# Altium PCB URC_ezFET_Lite.PcbDoc
Units mil, origin at the board's own origin, x right, y up, seen from the top; angles counter-clockwise.
Board outline 1870 x 1500 mil, 2 copper layers (Top Layer, Bottom Layer); 36 components, 29 nets, 175 pads, 52 vias.
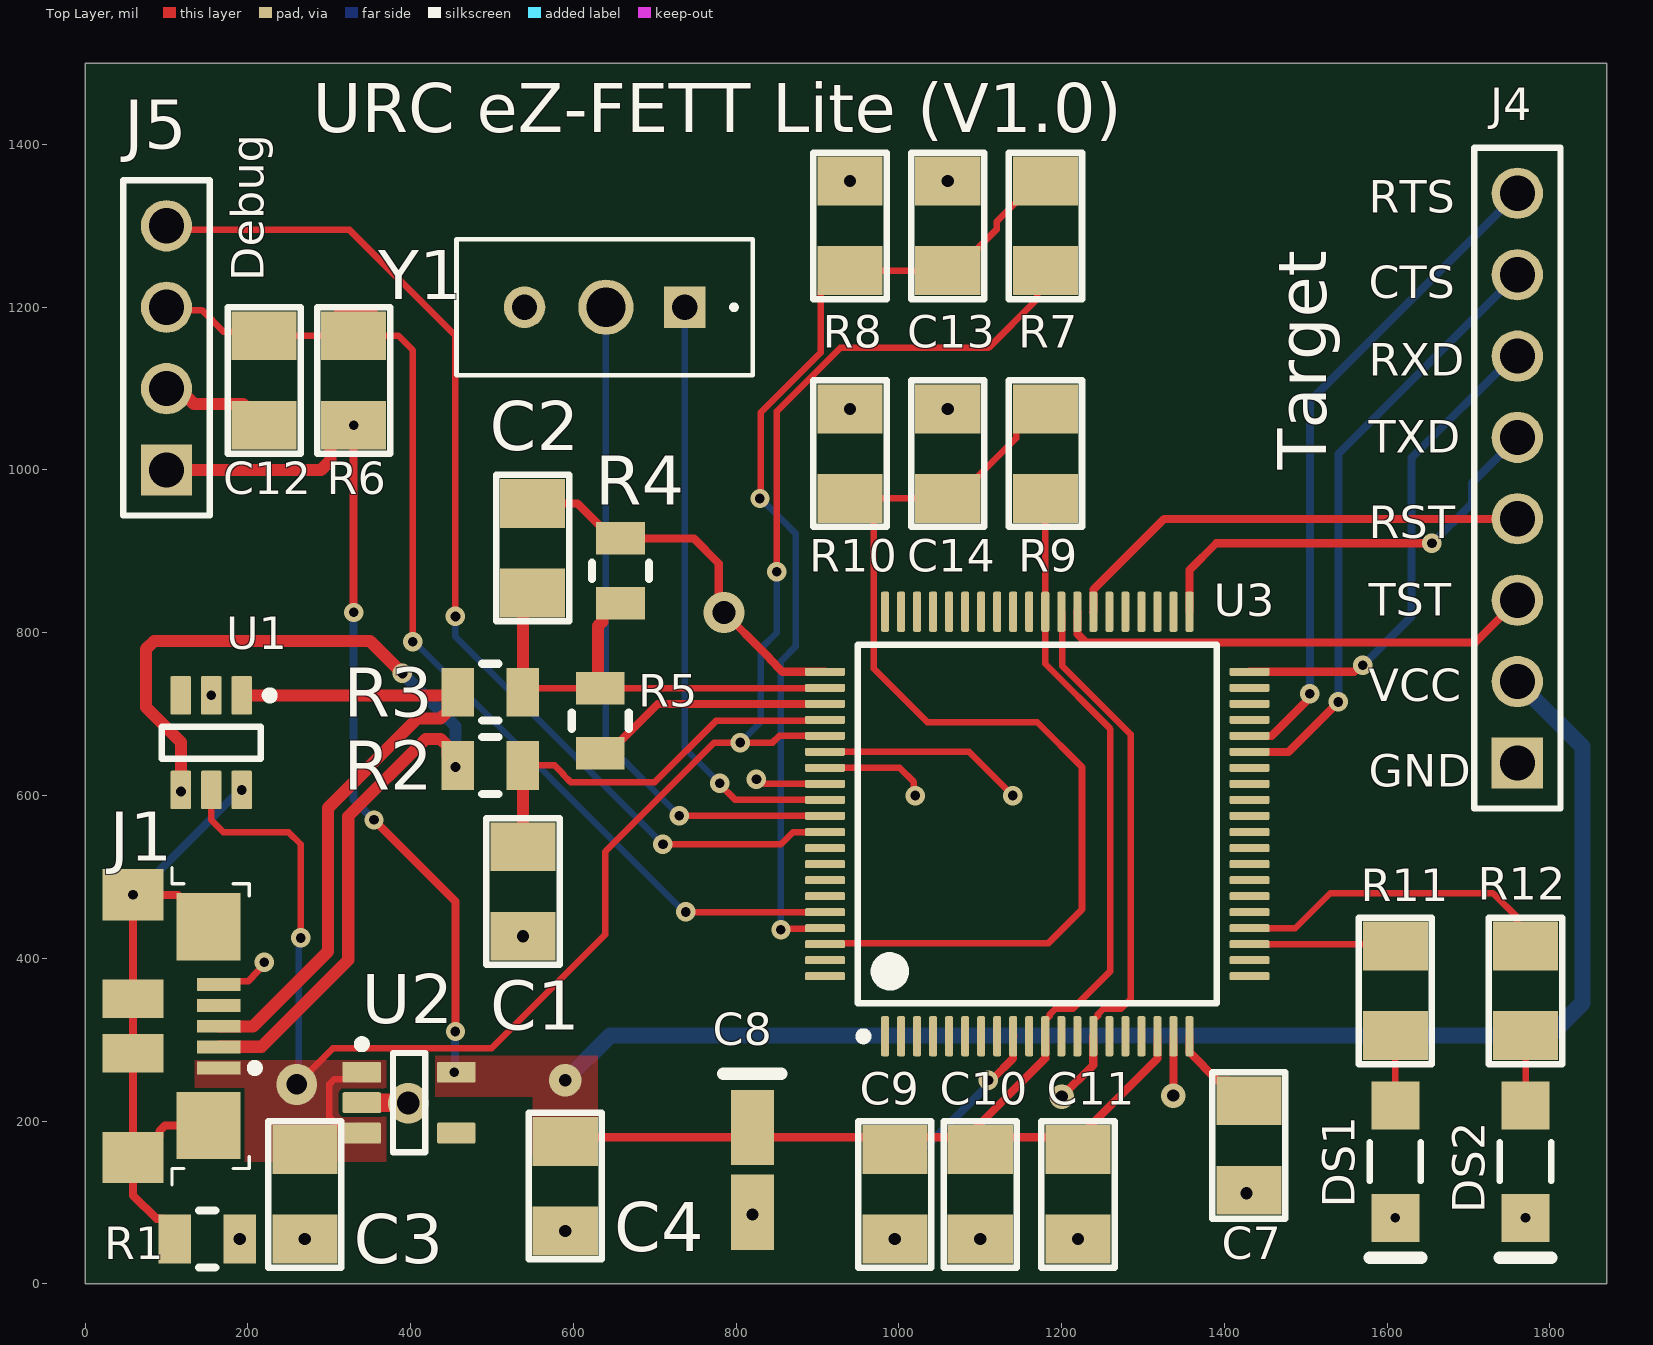
[diagram p0: Top Layer view]
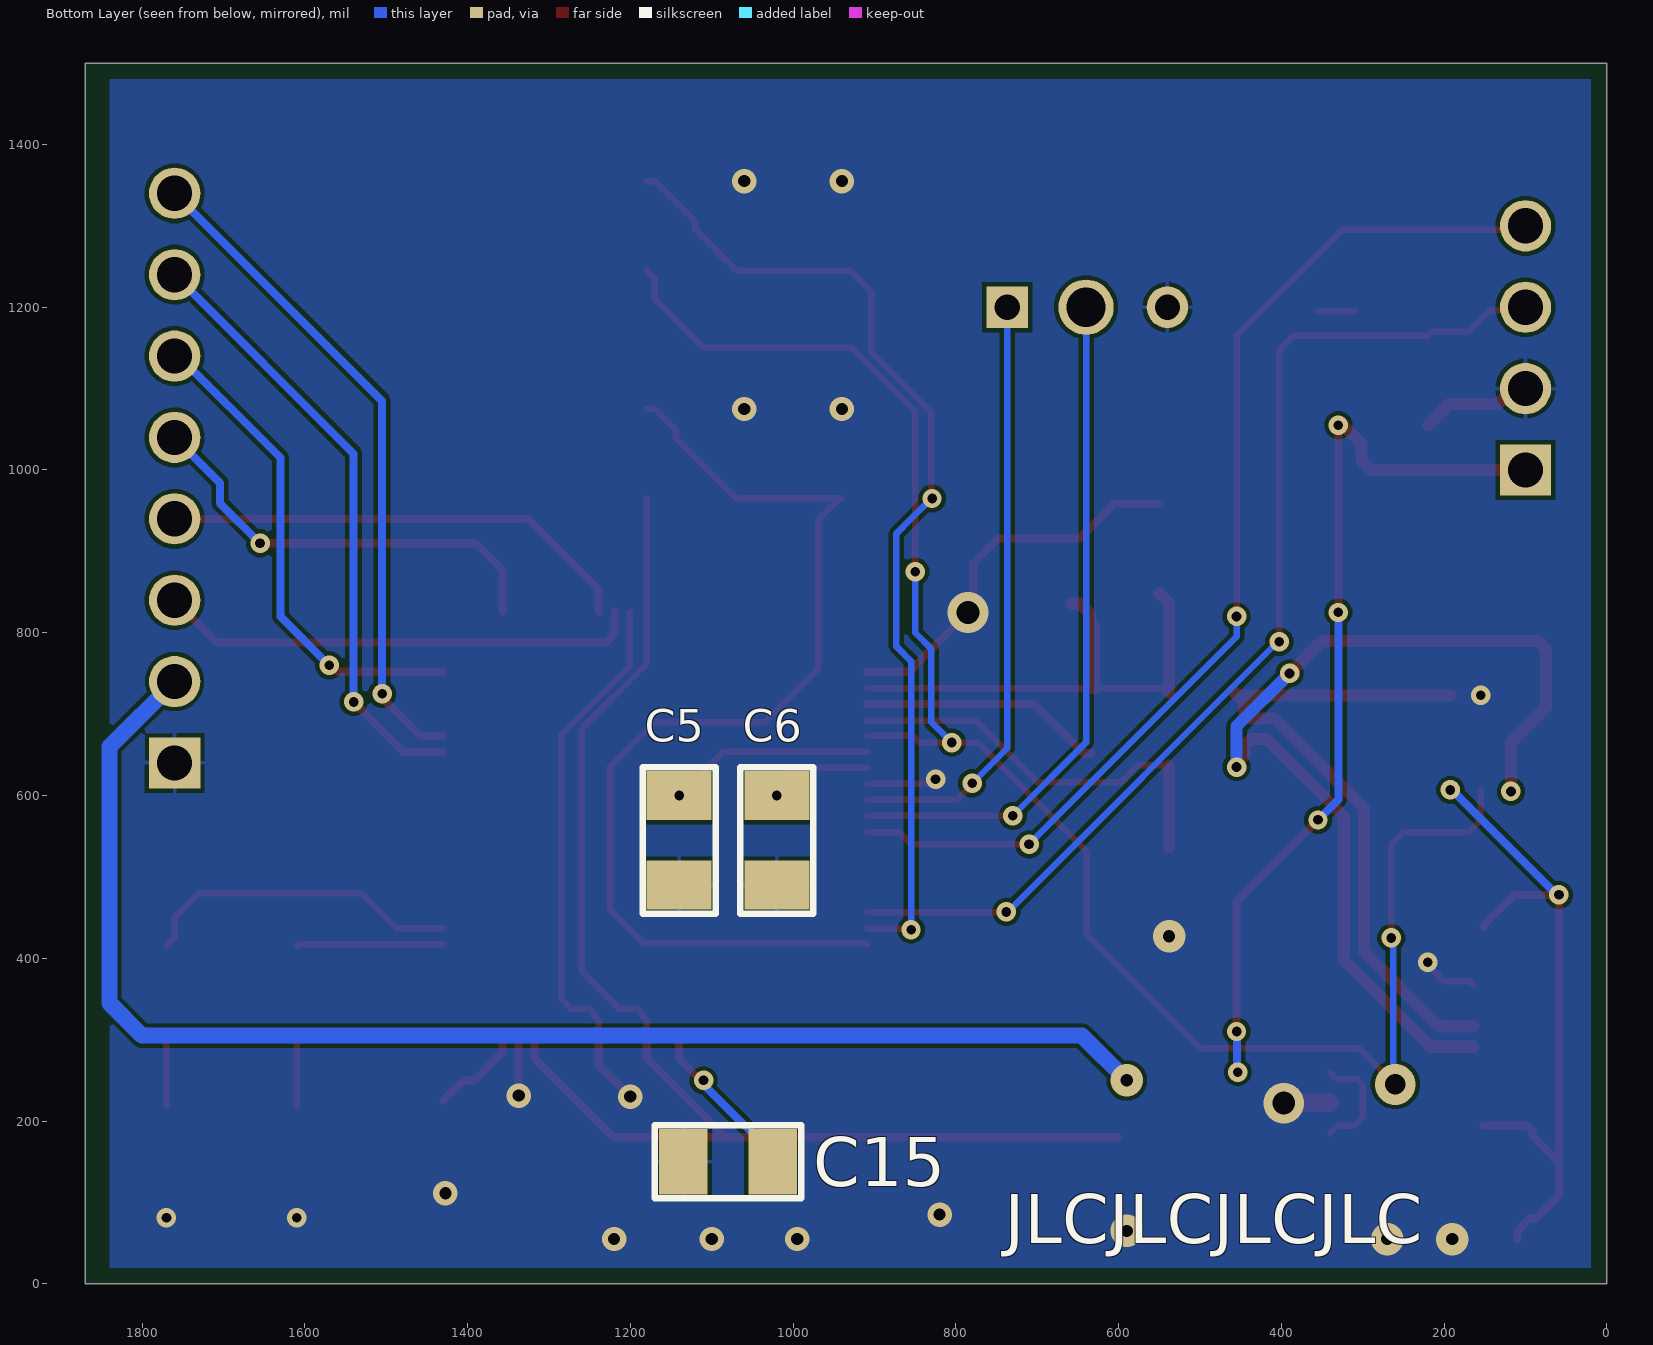
[diagram p1: Bottom Layer view, seen from below]
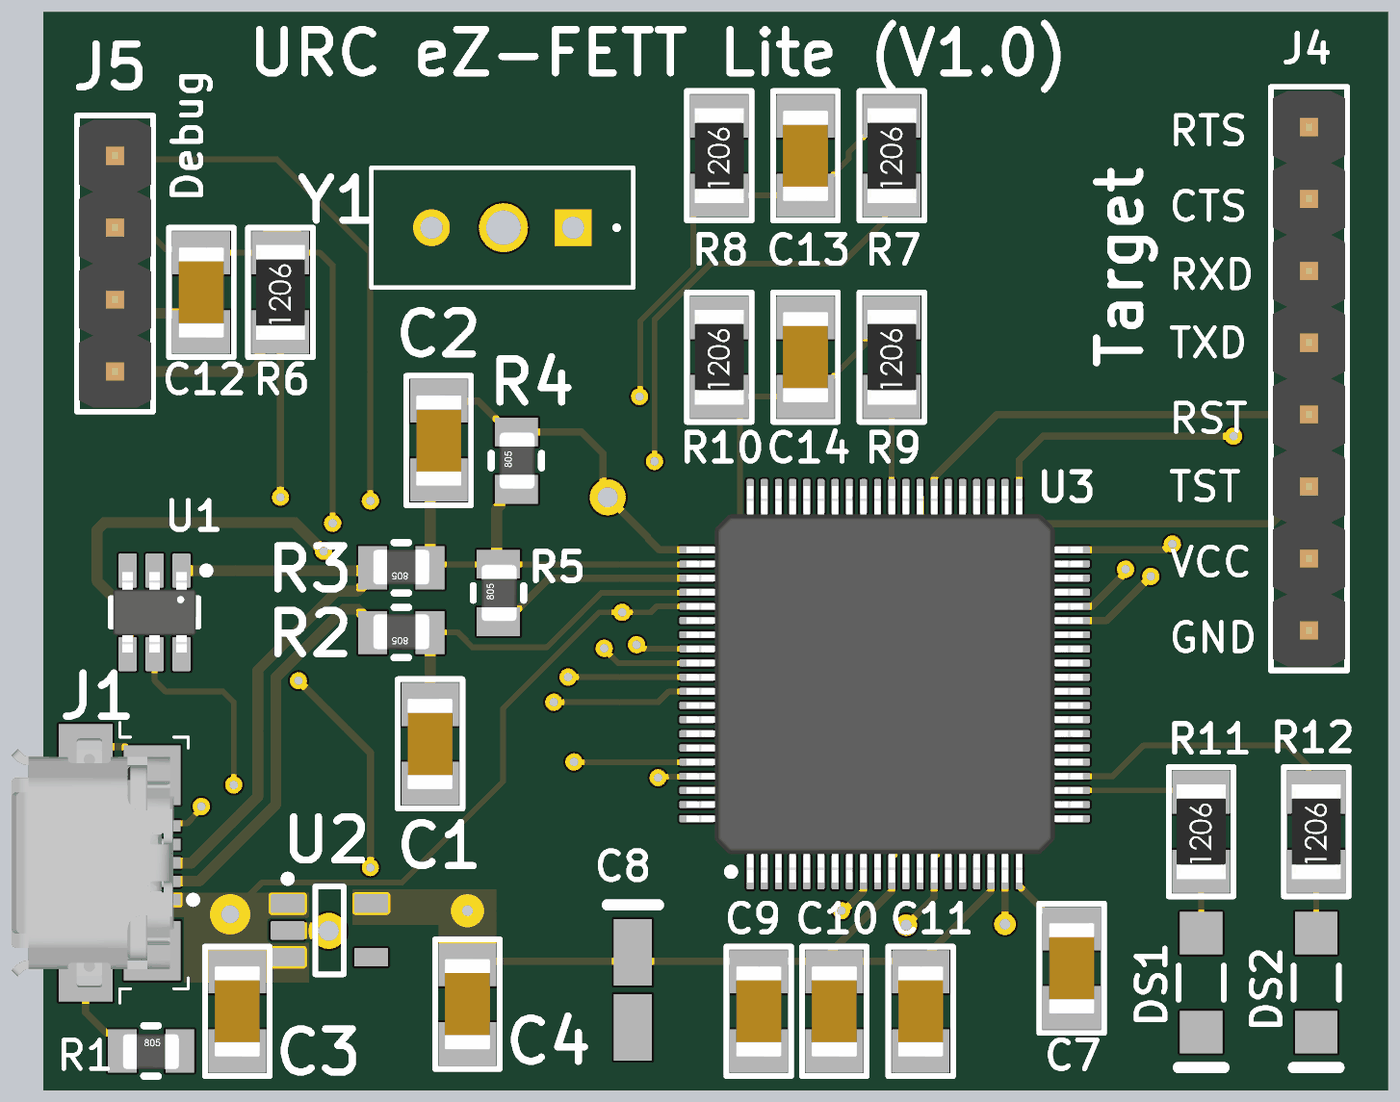
[diagram p2: 3D render of the assembled board from above, using the file's embedded part models]
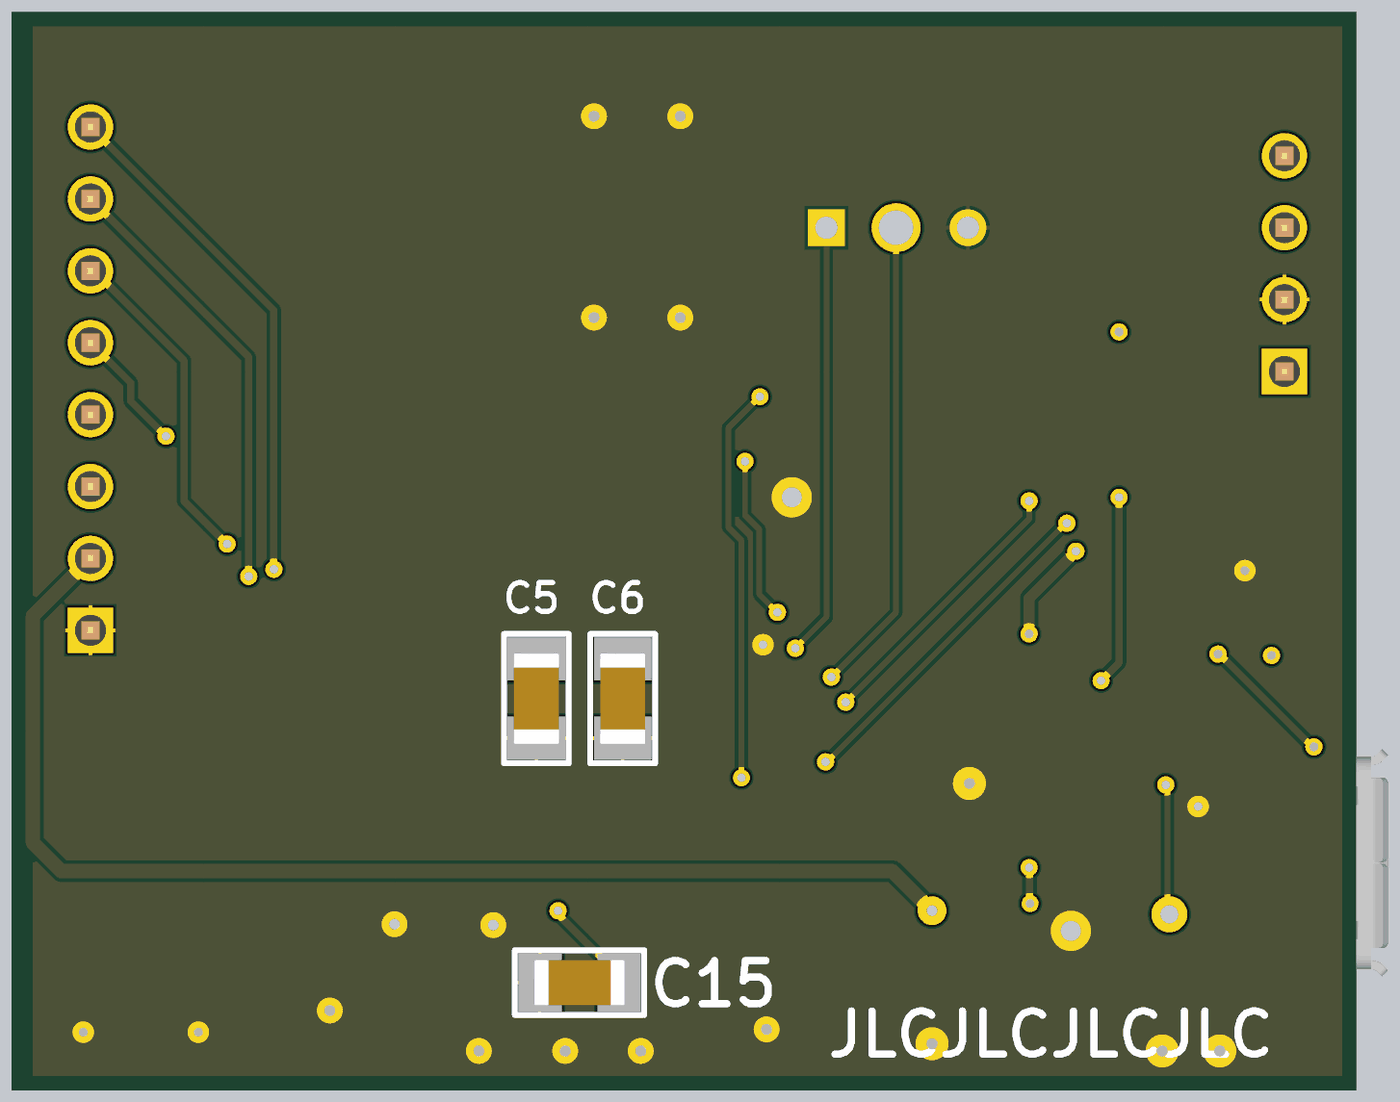
[diagram p3: 3D render of the assembled board from below, using the file's embedded part models]

## Layer stack, top to bottom
Top Solder: solder mask 0.4, Solder Resist, Dk 3.5
Top Layer: signal copper 1.4
Dielectric 1: dielectric 12.6, FR-4, Dk 4.8
Bottom Layer: signal copper 1.4
Bottom Solder: solder mask 0.4, Solder Resist, Dk 3.5

## Board outline
0,0 0,1500 1870,1500 1870,0

## Design rules (kind name [scope] priority, off if disabled: settings)
BoardOutlineClearance [All] p1: gap=7.87 ignorepadtopadclearanceinfootprint=FALSE
Clearance [All] p1: gap=5 ignorepadtopadclearanceinfootprint=FALSE except(9.84: Arc-Hole Track-Hole SMDPad-Hole THPad-Hole Via-Hole Fill-Hole Poly-Hole Region-Hole Text-Hole)
ComponentClearance [All] p1: gap=5 collisioncheckmode=3 verticalgap=5 showdistances=TRUE
DiffPairsRouting [All] p1: maxlimit=10 minlimit=5 mostfreqgap=5 toplayer_minwidth=5 toplayer_maxwidth=1000 toplayer_prefwidth=5 bottomlayer_minwidth=5 bottomlayer_maxwidth=1000 bottomlayer_prefwidth=5 substack1={C3BCEE91-9C6A-4448-B973-E072E894BD0B} toplayer_{c3bcee91-9c6a-4448-b973-e072e894bd0b}_minwidth=15 toplayer_{c3bcee91-9c6a-4448-b973-e072e894bd0b}_maxwidth=15 toplayer_{c3bcee91-9c6a-4448-b973-e072e894bd0b}_prefwidth=15 bottomlayer_{c3bcee91-9c6a-4448-b973-e072e894bd0b}_minwidth=15 bottomlayer_{c3bcee91-9c6a-4448-b973-e072e894bd0b}_maxwidth=15 bottomlayer_{c3bcee91-9c6a-4448-b973-e072e894bd0b}_prefwidth=15 maxuncoupledlength=500
Height [All] p1: minheight=0 maxheight=71497.94 prefheight=500
HoleSize [All] p1: absolutevalues=TRUE maxlimit=248.03 minlimit=11.81 maxpercent=80.000 minpercent=20.000
HoleToHoleClearance [All] p1: gap=9.84 allowstackedmicrovias=FALSE
MinimumAnnularRing [All] p1: minimumring=3
MinimumSolderMaskSliver [All] p1: minsoldermaskwidth=0
PlaneClearance [All] p1: clearance=5
PlaneConnect PlaneConnectPowerPads [InPadClass('PowerPads')] p1: planeconnectstyle=Direct reliefexpansion=20 reliefentries=4 reliefconductorwidth=10 reliefairgap=10
PlaneConnect [All] p2: pad.planeconnectstyle=Relief pad.reliefexpansion=11.81 pad.reliefentries=4 pad.reliefconductorwidth=5 pad.reliefairgap=5 via.planeconnectstyle=Direct via.reliefexpansion=11.81 via.reliefentries=4 via.reliefconductorwidth=5 via.reliefairgap=5
PolygonConnect PolygonConnectPowerPads [All vs (InPadClass('PowerPads'))] p1: connectstyle=Direct reliefconductorwidth=10 reliefentries=4 polygonreliefangle="90 Angle" airgapwidth=10
PolygonConnect [All] p2: thpad.connectstyle=Relief thpad.reliefconductorwidth=5 thpad.reliefentries=4 thpad.polygonreliefangle="90 Angle" thpad.airgapwidth=5 smdpad.connectstyle=Relief smdpad.reliefconductorwidth=5 smdpad.reliefentries=4 smdpad.polygonreliefangle="90 Angle" smdpad.airgapwidth=5 via.connectstyle=Direct via.reliefconductorwidth=5 via.reliefentries=4 via.polygonreliefangle="90 Angle" via.airgapwidth=5
RoutingVias [All] p1: holewidth=11.81 width=23.62 viastyle="Through Hole" minholewidth=11.81 minwidth=23.62 maxholewidth=23.62 maxwidth=259.84
SilkToSilkClearance [All] p1: silktosilkclearance=0
SilkToSolderMaskClearance [IsPad] p1: minsilkscreentomaskgap=0 clearancetoexposedcopper=TRUE
SolderMaskExpansion [All] p1: expansion=2.95 istentingtop=FALSE
Width [All] p1: maxlimit=1000 minlimit=5 preferedwidth=5 substack1={C3BCEE91-9C6A-4448-B973-E072E894BD0B} minimp=50.000000 maximp=50.000000 favimp=50.000000
20 further rules are at their usual default settings.

## Classes and differential pairs
component class URC_eZFET_Lite-Headers: J4 J5
component class URC_ezFET_Lite: C5 C6 C7 C8 C9 C10 C11 C12 C13 C14 C15 DS1 DS2 R5 R6 R7 R8 R9 R10 R11 R12 U3 Y1
component class URC_ezFET_Lite-USB: C1 C2 C3 C4 J1 R1 R2 R3 R4 U1 U2
differential pair USB_RES: +USB_RES_P -USB_RES_N
differential pair USB_D: +USB_D_P -USB_D_N

## Components (designator, comment, footprint, x,y, rotation, side; value= is the part's Value field where it differs from the comment)
C1 "10pF" SMD-1206C 538,482 r0 top
C2 "10pF" SMD-1206C 550,904 r180 top
C3 "0.10µF" SMD-1206C 270,110 r0 top
C4 "0.10µF" SMD-1206C 590,120 r0 top
C5 "0.22µF" SMD-1206C 1140,545 r180 bottom
C6 "0.22µF" SMD-1206C 1020,545 r180 bottom
C7 "0.47µF" SMD-1206C 1430,170 r0 top
C8 "T491A106K010AT" KEMT-A-3216-18-2_M 820,140 r270 top
C9 "0.10µF" SMD-1206C 995,110 r0 top
C10 "0.10µF" SMD-1206C 1100,110 r0 top
C11 "0.10µF" SMD-1206C 1220,110 r0 top
C12 "1000pF" SMD-1206C 220,1110 r0 top
C13 "33pF" SMD-1206C 1060,1300 r180 top
C14 "33pF" SMD-1206C 1060,1020 r180 top
C15 "0.10µF" SMD-1206C 1080,150 r270 bottom
DS1 "HSMH-C150" AVAG-HSMX-C150_V 1610,150 r270 top
DS2 "HSMG-C150" AVAG-HSMX-C150_V 1770,150 r270 top
J1 "ZX62R-B-5P" HIRO-ZX62R-B-5P_V 111.66,316.54 r270 top
J4 "61300811121" 61300811121 1760,990 r90 top
J5 "61300411121" 61300411121 100,1150 r90 top
R1 "33" SMD-0805-RES 150,55 r270 top
R2 "27" SMD-0805-RES 498,637 r90 top
R3 "27" SMD-0805-RES 498,727 r90 top
R4 "1M" SMD-0805-RES 658,876 r0 top
R5 "1.4k" SMD-0805-RES 633,692 r0 top
R6 "47k" SMD-1206-RES 330,1110 r0 top
R7 "240k" SMD-1206-RES 1180,1300 r0 top
R8 "150k" SMD-1206-RES 940,1300 r0 top
R9 "220k" SMD-1206-RES 1180,1020 r0 top
R10 "220k" SMD-1206-RES 940,1020 r0 top
R11 "470" SMD-1206-RES 1610,360 r0 top
R12 "390" SMD-1206-RES 1770,360 r0 top
U1 "TPD4E001DBVR" DBV0006A_M 155,665 r270 top
U2 "TLV70033DDCR" DDC0005A_M 398.07,222.6 r0 top
U3 "MSP430F5529IPN" PN0080A_L 1170,565 r90 top
Y1 "CSTLS4M00G56-A0" CSTLS_G 540,1200 r180 top value=Value

## Footprints (in the part's own frame and the unit in brackets; to place one, negate y for a bottom-side part, rotate by r counter-clockwise, add the part's x,y. Pads: shape width x height; smd on the part's side, far side on the other; paste and mask are expansions set on the pad)
61300411121 [mm] "Pin Header, pitch 2.54 mm, THT, Vertical, single row, 4p"
  rect 1.6x1.6 hole 1.1: 1(-3.81,0)
  round 1.6 hole 1.1: 2(-1.27,0) 3(1.27,0) 4(3.81,0)
  silkscreen extent -5.23,-1.35 5.23,1.35, body extent -5.08,-1.27 5.08,1.27, height 8.57
61300811121 [mm] "Pin Header, pitch 2.54 mm, THT, Vertical, single row, 8p"
  rect 1.6x1.6 hole 1.1: 1(-8.89,0)
  round 1.6 hole 1.1: 2(-6.35,0) 3(-3.81,0) 4(-1.27,0) 5(1.27,0) 6(3.81,0) 7(6.35,0) 8(8.89,0)
  silkscreen extent -10.31,-1.35 10.31,1.35, body extent -10.16,-1.27 10.16,1.27, height 8.57
AVAG-HSMX-C150_V [mm] "SMD, 2-Leads, Body 3.2x1.6mm"
  rect 1.5x1.5 smd: 1(-1.75,0) 2(1.75,0)
  silkscreen extent -0.6,-0.8 3,0.8, body extent -1.6,-0.8 1.6,0.8, height 1.1
CSTLS_G [mil]
  rect 51x51 hole 31 mask+0: 1(-196.85,0)
  round 51 hole 31 mask+0: 2(0,0)
  round 68 hole 48: 3(-100,0)
  silkscreen extent -280,-84 84,84, body extent 0,0 10,10, height 10
DBV0006A_M [mm] "SOT23, 6-Leads, Body 3.05x1.75mm, Pitch 0.95mm, IPC Low Density"
  rrect15% 1.2x0.65 smd: 1(-1.475,0.95) 2(-1.475,0) 3(-1.475,-0.95) 4(1.475,-0.95) 5(1.475,0) 6(1.475,0.95)
  silkscreen extent -1.6,-1.55 0.5,1.95, body extent -1.42,-1.46 1.42,1.46, height 1.11
DDC0005A_M [mm] "SOT23, 5-Leads, Body 3.05x1.75mm, Pitch 0.95mm, IPC Low Density"
  rrect15% 1.2x0.65 smd: 1(-1.475,0.95) 2(-1.475,0) 3(-1.475,-0.95) 4(1.475,-0.95) 5(1.475,0.95)
  silkscreen extent -1.6,-1.55 0.5,1.95, body extent -0.88,-1.52 0.87,1.53, height 1.1
HIRO-ZX62R-B-5P_V [mm] "USB Micro-B R/A Connector"
  rect 0.4x1.35 smd: 1(1.3,1.338) 2(0.65,1.338) 3(0,1.338) 4(-0.65,1.338) 5(-1.3,1.338)
  rect 2.1x2 smd: 6(-3.1,1.012) 11(3.1,1.012)
  rect 1.6x1.9 smd: 7(-4.1,-1.338) 10(4.1,-1.338)
  rect 1.2x1.9 smd: 8(-0.85,-1.338) 9(0.85,-1.338)
  silkscreen extent -4.95,-0.13 4.95,2.58, body extent -4.4,-3.95 4.4,1.78, height 2.71
KEMT-A-3216-18-2_M [mm] "Molded TAN Capacitor, 2-Leads, Body 3.4x1.8mm, IPC Low Density"
  rect 2.35x1.35 smd: 1(-1.325,0) 2(1.325,0)
  silkscreen extent -3,-0.9 -3,0.9, body extent -1.7,-0.9 1.7,0.9, height 1.8
PN0080A_L [mm] "QFP, 80-Leads, Body 12x12mm, Pitch 0.5mm, IPC High Density"
  rrect40% 1.25x0.25 smd: 1(-6.625,4.75) 2(-6.625,4.25) 3(-6.625,3.75) 4(-6.625,3.25) 5(-6.625,2.75) 6(-6.625,2.25) 7(-6.625,1.75) 8(-6.625,1.25) 9(-6.625,0.75) 10(-6.625,0.25) 11(-6.625,-0.25) 12(-6.625,-0.75) 13(-6.625,-1.25) 14(-6.625,-1.75) 15(-6.625,-2.25) 16(-6.625,-2.75) 17(-6.625,-3.25) 18(-6.625,-3.75) 19(-6.625,-4.25) 20(-6.625,-4.75) 41(6.625,-4.75) 42(6.625,-4.25) 43(6.625,-3.75) 44(6.625,-3.25) 45(6.625,-2.75) 46(6.625,-2.25) 47(6.625,-1.75) 48(6.625,-1.25) 49(6.625,-0.75) 50(6.625,-0.25) 51(6.625,0.25) 52(6.625,0.75) 53(6.625,1.25) 54(6.625,1.75) 55(6.625,2.25) 56(6.625,2.75) 57(6.625,3.25) 58(6.625,3.75) 59(6.625,4.25) 60(6.625,4.75)
  rrect40% 0.25x1.25 smd: 21(-4.75,-6.625) 22(-4.25,-6.625) 23(-3.75,-6.625) 24(-3.25,-6.625) 25(-2.75,-6.625) 26(-2.25,-6.625) 27(-1.75,-6.625) 28(-1.25,-6.625) 29(-0.75,-6.625) 30(-0.25,-6.625) 31(0.25,-6.625) 32(0.75,-6.625) 33(1.25,-6.625) 34(1.75,-6.625) 35(2.25,-6.625) 36(2.75,-6.625) 37(3.25,-6.625) 38(3.75,-6.625) 39(4.25,-6.625) 40(4.75,-6.625) 61(4.75,6.625) 62(4.25,6.625) 63(3.75,6.625) 64(3.25,6.625) 65(2.75,6.625) 66(2.25,6.625) 67(1.75,6.625) 68(1.25,6.625) 69(0.75,6.625) 70(0.25,6.625) 71(-0.25,6.625) 72(-0.75,6.625) 73(-1.25,6.625) 74(-1.75,6.625) 75(-2.25,6.625) 76(-2.75,6.625) 77(-3.25,6.625) 78(-3.75,6.625) 79(-4.25,6.625) 80(-4.75,6.625)
  silkscreen extent -6.75,-5.6 5.6,5.6, body extent -7,-7 7,7, height 1.56
SMD-0805-RES [mil]
  rect 60x40 smd: 1(0,40) 2(0,-40)
  silkscreen extent -35,-10 35,10, body extent -24,-39 26,39, height 31
SMD-1206-RES [mil]
  rect 80x60 smd: 1(0,55) 2(0,-55)
  silkscreen extent -45,-90 45,90, body extent -34,-66 34,66, height 33
SMD-1206C [mil]
  rect 80x60 smd: 1(0,55) 2(0,-55)
  silkscreen extent -45,-90 45,90, body extent -31,-63 32,63, height 39

## Part data
C1 C2: library part GCM31A7U2J100JX01D, "CAP CER 10PF 630V U2J 1206", Digi-Key Part Number=490-5037-1-ND, Manufacturer="Murata Electronics North America", Operating Temperature="-55°C ~ 125°C", Package / Case="1206 (3216 Metric)", Ratings=AEC-Q200, Temperature Coefficient=U2J, Tolerance=±5%, Voltage=630V, @ qty=0, Applications=Automotive, Datasheets=http://www.murata.com/~/media/webrenewal/support/library/catalog/products/capacitor/mlcc/c03e.ashx, Factory Stock=0, Features=-, Height - Seated (Max)=-, Image=//media.digikey.com/Renders/Murata%20Renders/GR331BD72E473KW01L.jpg, Lead Spacing=-, Lead Style=-, Minimum Quantity=1, Mounting Type="Surface Mount, MLCC", Packaging="Cut Tape (CT)", Part Number=GCM31A7U2J100JX01D, Part Status=Active, Quantity Available=4301, Series=GCM, Size / Dimension="0.126\" L x 0.063\" W (3.20mm x 1.60mm)", Thickness (Max)="0.039\" (1.00mm)", Unit Price (USD)=0.52
C3 C4 C9 C10 C11: library part GCM319R71H104KA37D, "CAP CER 0.1UF 50V X7R 1206", Digi-Key Part Number=490-11166-1-ND, Manufacturer="Murata Electronics North America", Operating Temperature="-55°C ~ 125°C", Package / Case="1206 (3216 Metric)", Ratings=AEC-Q200, Temperature Coefficient=X7R, Tolerance=±10%, Voltage=50V, @ qty=0, Applications=Automotive, Datasheets=http://www.murata.com/~/media/webrenewal/support/library/catalog/products/capacitor/mlcc/c03e.ashx, Factory Stock=0, Features=-, Height - Seated (Max)=-, Image=//media.digikey.com/Renders/Murata%20Renders/GR331BD72E473KW01L.jpg, Lead Spacing=-, Lead Style=-, Minimum Quantity=1, Mounting Type="Surface Mount, MLCC", Packaging="Cut Tape (CT)", Part Number=GCM319R71H104KA37D, Part Status=Active, Quantity Available=5066, Series=GCM, Size / Dimension="0.126\" L x 0.063\" W (3.20mm x 1.60mm)", Thickness (Max)="0.037\" (0.95mm)", Unit Price (USD)=0.21
C5 C6: library part GCM31MR71H224KA37L, "CAP CER 0.22UF 50V X7R 1206", Digi-Key Part Number=490-8059-1-ND, Manufacturer="Murata Electronics North America", Operating Temperature="-55°C ~ 125°C", Package / Case="1206 (3216 Metric)", Ratings=AEC-Q200, Temperature Coefficient=X7R, Tolerance=±10%, Voltage=50V, @ qty=0, Applications=Automotive, Datasheets=http://www.murata.com/~/media/webrenewal/support/library/catalog/products/capacitor/mlcc/c03e.ashx, Factory Stock=0, Features=-, Height - Seated (Max)=-, Image=//media.digikey.com/Renders/Murata%20Renders/GR331BD72E473KW01L.jpg, Lead Spacing=-, Lead Style=-, Minimum Quantity=1, Mounting Type="Surface Mount, MLCC", Packaging="Cut Tape (CT)", Part Number=GCM31MR71H224KA37L, Part Status=Active, Quantity Available=6941, Series=GCM, Size / Dimension="0.126\" L x 0.063\" W (3.20mm x 1.60mm)", Thickness (Max)="0.049\" (1.25mm)", Unit Price (USD)=0.34
C7: library part GCM31MR71H474KA37L, "CAP CER 0.47UF 50V X7R 1206", Digi-Key Part Number=490-8061-1-ND, Manufacturer="Murata Electronics North America", Operating Temperature="-55°C ~ 125°C", Package / Case="1206 (3216 Metric)", Ratings=AEC-Q200, Temperature Coefficient=X7R, Tolerance=±10%, Voltage=50V, @ qty=0, Applications=Automotive, Datasheets=http://www.murata.com/~/media/webrenewal/support/library/catalog/products/capacitor/mlcc/c03e.ashx, Factory Stock=0, Features=-, Height - Seated (Max)=-, Image=//media.digikey.com/Renders/Murata%20Renders/GR331BD72E473KW01L.jpg, Lead Spacing=-, Lead Style=-, Minimum Quantity=1, Mounting Type="Surface Mount, MLCC", Packaging="Cut Tape (CT)", Part Number=GCM31MR71H474KA37L, Part Status=Active, Quantity Available=11849, Series=GCM, Size / Dimension="0.126\" L x 0.063\" W (3.20mm x 1.60mm)", Thickness (Max)="0.049\" (1.25mm)", Unit Price (USD)=0.53
C8: library part CMP-2000-05172-1, "Capacitor, Tantalum, 10 uF, +/- 10%, 10 V, -55 to 125 degC, 2-Pin SMD (1206), RoHS, Tape and Reel", Capacitance=10µF, ESR (Equivalent Series Resistance)=3.8Ohm, Lifetime @ Temp.=2000Hrs@85degC, Manufacturer=Kemet, Manufacturer Size Code=A, Operating Temperature=-55degC~125degC, Package / Case=1206(3216Metric), Package Description="2-Pin Surface Mount Device, Body 3.2 x 1.6 mm", Package Reference=1206, Standard Package=2,000, Tolerance=±10%, Voltage - Rated=10V, Catalog Drawings=T49x,T5xxSeries_A-side1T49x,T5xxSeries_A,B-side2T49x,T5xxSeries_A,SBottom, Category=Capacitors, Datasheet URL=http://www.farnell.com/datasheets/1824869.pdf, Datasheet Version=Apr-14, Family=TantalumCapacitors, Features=GeneralPurpose, Height - Seated (Max)="0.071\"(1.80mm)", Lead Spacing=-, Manufacturer URL=http://www.kemet.com/, Mounting Type=SurfaceMount, Online Catalog=T491Series, Other Names=399-3684-2, Packaging=Tape&Reel(TR), Product Training Modules=CapacitorBasics-TypicalUsesforCapacitorsDeratingGuidelinesforSurfaceMountTantalumCapacitors, Series=T491, Size / Dimension="0.126\"Lx0.063\"W(3.20mmx1.60mm)", Type=Molded
C12: library part GRM319R71H102KA01D, "CAP CER 1000PF 50V X7R 1206", Digi-Key Part Number=490-11610-1-ND, Manufacturer="Murata Electronics North America", Operating Temperature="-55°C ~ 125°C", Package / Case="1206 (3216 Metric)", Ratings=-, Temperature Coefficient=X7R, Tolerance=±10%, Voltage=50V, @ qty=0, Applications="General Purpose", Datasheets=http://www.murata.com/~/media/webrenewal/support/library/catalog/products/capacitor/mlcc/c02e.pdf, Factory Stock=0, Features=-, Height - Seated (Max)=-, Image=//media.digikey.com/Renders/Murata%20Renders/GR331BD72E473KW01L.jpg, Lead Spacing=-, Lead Style=-, Minimum Quantity=1, Mounting Type="Surface Mount, MLCC", Packaging="Cut Tape (CT)", Part Number=GRM319R71H102KA01D, Part Status=Active, Quantity Available=4837, Series=GRM, Size / Dimension="0.126\" L x 0.063\" W (3.20mm x 1.60mm)", Thickness (Max)="0.037\" (0.95mm)", Unit Price (USD)=0.19
C13 C14: library part GCM31A7U2J330JX01D, "CAP CER 33PF 630V U2J 1206", Digi-Key Part Number=490-5040-1-ND, Manufacturer="Murata Electronics North America", Operating Temperature="-55°C ~ 125°C", Package / Case="1206 (3216 Metric)", Ratings=AEC-Q200, Temperature Coefficient=U2J, Tolerance=±5%, Voltage=630V, @ qty=0, Applications=Automotive, Datasheets=http://www.murata.com/~/media/webrenewal/support/library/catalog/products/capacitor/mlcc/c03e.ashx, Factory Stock=0, Features=-, Height - Seated (Max)=-, Image=//media.digikey.com/Renders/Murata%20Renders/GR331BD72E473KW01L.jpg, Lead Spacing=-, Lead Style=-, Minimum Quantity=1, Mounting Type="Surface Mount, MLCC", Packaging="Cut Tape (CT)", Part Number=GCM31A7U2J330JX01D, Part Status=Active, Quantity Available=10466, Series=GCM, Size / Dimension="0.126\" L x 0.063\" W (3.20mm x 1.60mm)", Thickness (Max)="0.039\" (1.00mm)", Unit Price (USD)=0.52
C15: library part GCJ31CR72E104KXJ3L, "CAP CER 0.1UF 250V X7R 1206", Digi-Key Part Number=490-12647-1-ND, Manufacturer="Murata Electronics North America", Operating Temperature="-55°C ~ 125°C", Package / Case="1206 (3216 Metric)", Ratings=AEC-Q200, Temperature Coefficient=X7R, Tolerance=±10%, Voltage=250V, @ qty=0, Applications="Automotive, Boardflex Sensitive", Datasheets=http://www.murata.com/~/media/webrenewal/support/library/catalog/products/capacitor/mlcc/c03e.ashx, Factory Stock=0, Features="Soft Termination", Height - Seated (Max)=-, Image=//media.digikey.com/Renders/Murata%20Renders/GR331BD72E473KW01L.jpg, Lead Spacing=-, Lead Style=-, Minimum Quantity=1, Mounting Type="Surface Mount, MLCC", Packaging="Cut Tape (CT)", Part Number=GCJ31CR72E104KXJ3L, Part Status=Active, Quantity Available=3645, Series=GCJ, Size / Dimension="0.126\" L x 0.063\" W (3.20mm x 1.60mm)", Thickness (Max)="0.071\" (1.80mm)", Unit Price (USD)=0.36
DS1: library part CMP-2000-06426-1, "LED Uni-Color Red, 65 mW, 25 mA, -40 to 85 degC, 2-Pin SMD, RoHS, Tape and Reel", Emitting Color=Red, Forward Current=25mA, Forward Voltage=2.6V, Manufacturer=Avago, Operating Temp Range=-40Cto85C, Operating Temperature Classification=Industrial, Package Description="2-Pin Surface Mount Device, Body 3.2 x 1.6 mm", Package Reference=HSMX-C150, Package Type=ChipLed, Power Dissipation=78W, Reverse Voltage=5V, Test Current (It)=20mA, Chip Material=GaAlAs, Datasheet URL=http://media.digikey.com/pdf/Data%20Sheets/Avago%20PDFs/HSMz-Czzz.pdf, Datasheet Version=03/2012, DELETED=Compliant, Dominant Wave Length=639nm, High Brightness=No, Lens Dimensions=2x1.6x0.6mm, Lens Type=ColorlessDiffused, Lum Intensity=17mcd, Luminous Intensity=17mcd, Main Category=ChipLED, Manufacturer URL=http://www.avagotech.com/, Mounting=SurfaceMount, Mounting Technology=SurfaceMount, Number of  Elements=1, Packaging=TapeandReel, Peak Wavelength=660nm, Pin Count=2, Product Depth (mm)=1.6mm, Product Height (mm)=1.1mm, Product Length (mm)=3.2mm, Rad Hardened=No, Shape Type=Rectangular, Type=Uni-Color, Viewing Angle=170deg
DS2: library part CMP-2000-05061-1, "Chip LED, Green, 65 mW, 25 mA, -40 to 85 degC, 2-Pin SMD, RoHS, Tape and Reel", Forward Current If=20mA, Forward Voltage=2.2V, Forward Voltage VF Max=2.6V, LED Colour=Green, Manufacturer=Avago, Operating Temperature Max=85degC, Operating Temperature Min=-30degC, Operating Temperature Range=-30degCto+85degC, Opto Case Style=SMD, Package Description="2-Pin Surface Mount Device, Body 3.2 x 1.6 mm", Package Reference=HSMX-C150, Reverse Protection Voltage=5V, Storage Temperature Min=-40degC, Bulb Size=1.6mmx2mm, Datasheet URL=https://datasheet.ciiva.com/11774/0900766b804a6539-11774272.pdf, Datasheet Version=Mar-12, Dominant Wavelength=572nm, External Depth=1.1mm, External Length / Height=3.2mm, External Width=1.6mm, Forward Current If Max=20mA, LED Mounting=SMD, LED Type=Standard, Lens Shape=Rectangular, Light Output Orientation=TopEmitting, Luminous Intensity=15mcd, Luminous Intensity @ If Min=4.5mcd, Luminous Intensity Typ=15mcd, Manufacturer URL=http://www.avagotech.com/, Material=GaP, Mounting Type=SMD, MSL=MSL2A-4weeks, No. of Pins=2, Opto Mounting Orientation=Top, Packaging=CutTape, Peak Wavelength=570nm, PIV Max=5V, Storage Temperature Max=85degC, SVHC=NoSVHC(16-Jun-2014), Viewing Angle=170deg, Voltage Vf Min=2.2V, Voltage Vf Typ=2.2V, Wavelength Typ=572nm
J1: library part CMP-0031-00001-1, "Connector; USBMicro-B,Reverse type, SMT; 5 Position; Right Angle", Operating Temperature="-30 to 85 degC", ComponentLink1Description="Manufacturer URL", ComponentLink1URL=http://www.hirose.com/â€Ž, ComponentLink2Description=Datasheet, ComponentLink2URL=http://www.hirose.co.jp/cataloge_hp/e24200011.pdf, DatasheetVersion=08/2010, Mounting Technology="Surface Mount", PackageDescription="5-Pin USB Micro-B R/A Connector", PackageReference=ZX62R-B-5P, PartNumber=ZX62R-B-5P
J4: library part CMP-1502-01076-1, "THT Vertical Pin Header WR-PHD, Pitch 2.54 mm, Single Row, 8 pins", Contact Resistance=20mOhm, Manufacturer="Wurth Elektronik", Operating Temperature=-40to105degC, Rated Current=3A, Withstanding Voltage=500VAC, Working Voltage=250VAC, Datasheet URL=https://katalog.we-online.de/em/datasheet/6130xx11121.pdf, Gender=Male, Manufacturer URL=http://www.we-online.de, Mounting Technology=THT, Orientation=Vertical, Package Reference=61300811121, Packaging=Bag, Part Number=61300811121, Pin Number=8, Pitch=2.54mm, Publisher=WurthElektronik, Row Number=Single
J5: library part CMP-1502-01064-1, "THT Vertical Pin Header WR-PHD, Pitch 2.54 mm, Single Row, 4 pins", Contact Resistance=20mOhm, Manufacturer="Wurth Elektronik", Operating Temperature=-40to105degC, Rated Current=3A, Withstanding Voltage=500VAC, Working Voltage=250VAC, Datasheet URL=https://katalog.we-online.de/em/datasheet/6130xx11121.pdf, Gender=Male, Manufacturer URL=http://www.we-online.de, Mounting Technology=THT, Orientation=Vertical, Package Reference=61300411121, Packaging=Bag, Part Number=61300411121, Pin Number=4, Pitch=2.54mm, Publisher=WurthElektronik, Row Number=Single
R1: library part ERJ-6ENF33R0V, "RES SMD 33 OHM 1% 1/8W 0805", Digi-Key Part Number=P33.0CCT-ND, Manufacturer="Panasonic Electronic Components", Operating Temperature="-55°C ~ 155°C", Package / Case="0805 (2012 Metric)", Power (Watts)="0.125W, 1/8W", Supplier Device Package=0805, Temperature Coefficient=±100ppm/°C, Tolerance=±1%, @ qty=1500, Composition="Thick Film", Datasheets=http://industrial.panasonic.com/www-cgi/jvcr13pz.cgi?E+PZ+3+AOA0002+ERJ6ENF33R0V+7+WW, Factory Stock=0, Failure Rate=-, Features="Automotive AEC-Q200", Height - Seated (Max)="0.028\" (0.70mm)", Image=//media.digikey.com/Renders/Panasonic%20Renders/ERJ-0805%20Pkg.jpg, Minimum Quantity=1, Number of Terminations=2, Packaging="Cut Tape (CT)", Part Number=ERJ-6ENF33R0V, Part Status=Active, Quantity Available=96423, Series=ERJ, Size / Dimension="0.079\" L x 0.049\" W (2.00mm x 1.25mm)", Unit Price (USD)=0.00729
R2 R3: library part ERJ-P06J270V, "RES SMD 27 OHM 5% 1/2W 0805", Digi-Key Part Number=P27ADCT-ND, Manufacturer="Panasonic Electronic Components", Operating Temperature="-55°C ~ 155°C", Package / Case="0805 (2012 Metric)", Power (Watts)="0.5W, 1/2W", Supplier Device Package=0805, Temperature Coefficient=±300ppm/°C, Tolerance=±5%, @ qty=1500, Composition="Thick Film", Datasheets=https://industrial.panasonic.com/cdbs/www-data/pdf/RDA0000/AOA0000C243.pdf, Factory Stock=0, Failure Rate=-, Features="Automotive AEC-Q200, Pulse Withstanding", Height - Seated (Max)="0.028\" (0.70mm)", Image=//media.digikey.com/Renders/Panasonic%20Renders/ERJ-0805%20Pkg.jpg, Minimum Quantity=1, Number of Terminations=2, Packaging="Cut Tape (CT)", Part Number=ERJ-P06J270V, Part Status=Active, Quantity Available=18271, Series=ERJ, Size / Dimension="0.079\" L x 0.049\" W (2.00mm x 1.25mm)", Unit Price (USD)=0.01839
R4: library part ERJ-P06J105V, "RES SMD 1M OHM 5% 1/2W 0805", Digi-Key Part Number=P1.0MADCT-ND, Manufacturer="Panasonic Electronic Components", Operating Temperature="-55°C ~ 155°C", Package / Case="0805 (2012 Metric)", Power (Watts)="0.5W, 1/2W", Supplier Device Package=0805, Temperature Coefficient=±200ppm/°C, Tolerance=±5%, @ qty=1500, Composition="Thick Film", Datasheets=https://industrial.panasonic.com/cdbs/www-data/pdf/RDA0000/AOA0000C243.pdf, Factory Stock=0, Failure Rate=-, Features="Automotive AEC-Q200, Pulse Withstanding", Height - Seated (Max)="0.028\" (0.70mm)", Image=//media.digikey.com/Renders/Panasonic%20Renders/ERJ-0805%20Pkg.jpg, Minimum Quantity=1, Number of Terminations=2, Packaging="Cut Tape (CT)", Part Number=ERJ-P06J105V, Part Status=Active, Quantity Available=36684, Series=ERJ, Size / Dimension="0.079\" L x 0.049\" W (2.00mm x 1.25mm)", Unit Price (USD)=0.01839
R5: library part ERJ-6ENF1401V, "RES SMD 1.4K OHM 1% 1/8W 0805", Digi-Key Part Number=P1.40KCCT-ND, Manufacturer="Panasonic Electronic Components", Operating Temperature="-55°C ~ 155°C", Package / Case="0805 (2012 Metric)", Power (Watts)="0.125W, 1/8W", Supplier Device Package=0805, Temperature Coefficient=±100ppm/°C, Tolerance=±1%, @ qty=1500, Composition="Thick Film", Datasheets=http://industrial.panasonic.com/www-cgi/jvcr13pz.cgi?E+PZ+3+AOA0002+ERJ6ENF1401V+7+WW, Factory Stock=0, Failure Rate=-, Features="Automotive AEC-Q200", Height - Seated (Max)="0.028\" (0.70mm)", Image=//media.digikey.com/Renders/Panasonic%20Renders/ERJ-0805%20Pkg.jpg, Minimum Quantity=1, Number of Terminations=2, Packaging="Cut Tape (CT)", Part Number=ERJ-6ENF1401V, Part Status=Active, Quantity Available=52856, Series=ERJ, Size / Dimension="0.079\" L x 0.049\" W (2.00mm x 1.25mm)", Unit Price (USD)=0.00729
R6: library part ERJ-P08J473V, "RES SMD 47K OHM 5% 2/3W 1206", Digi-Key Part Number=P47KALCT-ND, Manufacturer="Panasonic Electronic Components", Operating Temperature="-55°C ~ 155°C", Package / Case="1206 (3216 Metric)", Power (Watts)="0.667W, 2/3W", Supplier Device Package=1206, Temperature Coefficient=±200ppm/°C, Tolerance=±5%, @ qty=1500, Composition="Thick Film", Datasheets=https://industrial.panasonic.com/cdbs/www-data/pdf/RDA0000/AOA0000C243.pdf, Factory Stock=0, Failure Rate=-, Features="Automotive AEC-Q200, Pulse Withstanding", Height - Seated (Max)="0.028\" (0.70mm)", Image=//media.digikey.com/Renders/Panasonic%20Renders/ERJ-1206%20Pkg.jpg, Minimum Quantity=1, Number of Terminations=2, Packaging="Cut Tape (CT)", Part Number=ERJ-P08J473V, Part Status=Active, Quantity Available=29484, Series=ERJ, Size / Dimension="0.126\" L x 0.063\" W (3.20mm x 1.60mm)", Unit Price (USD)=0.02178
R7: library part ERJ-P08J244V, "RES SMD 240K OHM 5% 2/3W 1206", Digi-Key Part Number=P240KALCT-ND, Manufacturer="Panasonic Electronic Components", Operating Temperature="-55°C ~ 155°C", Package / Case="1206 (3216 Metric)", Power (Watts)="0.667W, 2/3W", Supplier Device Package=1206, Temperature Coefficient=±200ppm/°C, Tolerance=±5%, @ qty=1500, Composition="Thick Film", Datasheets=https://industrial.panasonic.com/cdbs/www-data/pdf/RDA0000/AOA0000C243.pdf, Factory Stock=0, Failure Rate=-, Features="Automotive AEC-Q200, Pulse Withstanding", Height - Seated (Max)="0.028\" (0.70mm)", Image=//media.digikey.com/Renders/Panasonic%20Renders/ERJ-1206%20Pkg.jpg, Minimum Quantity=1, Number of Terminations=2, Packaging="Cut Tape (CT)", Part Number=ERJ-P08J244V, Part Status=Active, Quantity Available=21188, Series=ERJ, Size / Dimension="0.126\" L x 0.063\" W (3.20mm x 1.60mm)", Unit Price (USD)=0.02178
R8: library part ERJ-P08J154V, "RES SMD 150K OHM 5% 2/3W 1206", Digi-Key Part Number=P150KALCT-ND, Manufacturer="Panasonic Electronic Components", Operating Temperature="-55°C ~ 155°C", Package / Case="1206 (3216 Metric)", Power (Watts)="0.667W, 2/3W", Supplier Device Package=1206, Temperature Coefficient=±200ppm/°C, Tolerance=±5%, @ qty=1500, Composition="Thick Film", Datasheets=https://industrial.panasonic.com/cdbs/www-data/pdf/RDA0000/AOA0000C243.pdf, Factory Stock=0, Failure Rate=-, Features="Automotive AEC-Q200, Pulse Withstanding", Height - Seated (Max)="0.028\" (0.70mm)", Image=//media.digikey.com/Renders/Panasonic%20Renders/ERJ-1206%20Pkg.jpg, Minimum Quantity=1, Number of Terminations=2, Packaging="Cut Tape (CT)", Part Number=ERJ-P08J154V, Part Status=Active, Quantity Available=30000, Series=ERJ, Size / Dimension="0.126\" L x 0.063\" W (3.20mm x 1.60mm)", Unit Price (USD)=0.02178
R9 R10: library part ERJ-P08J224V, "RES SMD 220K OHM 5% 2/3W 1206", Digi-Key Part Number=P220KALCT-ND, Manufacturer="Panasonic Electronic Components", Operating Temperature="-55°C ~ 155°C", Package / Case="1206 (3216 Metric)", Power (Watts)="0.667W, 2/3W", Supplier Device Package=1206, Temperature Coefficient=±200ppm/°C, Tolerance=±5%, @ qty=1500, Composition="Thick Film", Datasheets=https://industrial.panasonic.com/cdbs/www-data/pdf/RDA0000/AOA0000C243.pdf, Factory Stock=0, Failure Rate=-, Features="Automotive AEC-Q200, Pulse Withstanding", Height - Seated (Max)="0.028\" (0.70mm)", Image=//media.digikey.com/Renders/Panasonic%20Renders/ERJ-1206%20Pkg.jpg, Minimum Quantity=1, Number of Terminations=2, Packaging="Cut Tape (CT)", Part Number=ERJ-P08J224V, Part Status=Active, Quantity Available=11189, Series=ERJ, Size / Dimension="0.126\" L x 0.063\" W (3.20mm x 1.60mm)", Unit Price (USD)=0.02178
R11: library part ERJ-8ENF4700V, "RES SMD 470 OHM 1% 1/4W 1206", Digi-Key Part Number=P470FCT-ND, Manufacturer="Panasonic Electronic Components", Operating Temperature="-55°C ~ 155°C", Package / Case="1206 (3216 Metric)", Power (Watts)="0.25W, 1/4W", Supplier Device Package=1206, Temperature Coefficient=±100ppm/°C, Tolerance=±1%, @ qty=1500, Composition="Thick Film", Datasheets=http://industrial.panasonic.com/www-cgi/jvcr13pz.cgi?E+PZ+3+AOA0002+ERJ8ENF4700V+7+WW, Factory Stock=0, Failure Rate=-, Features="Automotive AEC-Q200", Height - Seated (Max)="0.028\" (0.70mm)", Image=//media.digikey.com/Renders/Panasonic%20Renders/ERJ-1206%20Pkg.jpg, Minimum Quantity=1, Number of Terminations=2, Packaging="Cut Tape (CT)", Part Number=ERJ-8ENF4700V, Part Status=Active, Quantity Available=55045, Series=ERJ, Size / Dimension="0.126\" L x 0.063\" W (3.20mm x 1.60mm)", Unit Price (USD)=0.00933
R12: library part ERJ-8ENF3900V, "RES SMD 390 OHM 1% 1/4W 1206", Digi-Key Part Number=P390FCT-ND, Manufacturer="Panasonic Electronic Components", Operating Temperature="-55°C ~ 155°C", Package / Case="1206 (3216 Metric)", Power (Watts)="0.25W, 1/4W", Supplier Device Package=1206, Temperature Coefficient=±100ppm/°C, Tolerance=±1%, @ qty=1500, Composition="Thick Film", Datasheets=http://industrial.panasonic.com/www-cgi/jvcr13pz.cgi?E+PZ+3+AOA0002+ERJ8ENF3900V+7+WW, Factory Stock=0, Failure Rate=-, Features="Automotive AEC-Q200", Height - Seated (Max)="0.028\" (0.70mm)", Image=//media.digikey.com/Renders/Panasonic%20Renders/ERJ-1206%20Pkg.jpg, Minimum Quantity=1, Number of Terminations=2, Packaging="Cut Tape (CT)", Part Number=ERJ-8ENF3900V, Part Status=Active, Quantity Available=65574, Series=ERJ, Size / Dimension="0.126\" L x 0.063\" W (3.20mm x 1.60mm)", Unit Price (USD)=0.00933
U1: library part CMP-0326-00058-3, "Low-Capacitance + / - 15-kV ESD Protection Array for High-Speed Data Interfaces, 4 Channels, -40 to +85 degC, 6-pin SOT-23 (DBV), Green (RoHS & no Sb/Br)", Breakdown Voltage(Min)(V)=11, IO Capacitance(Typ)(pF)=1.5, Manufacturer="Texas Instruments", 1394 / Firewire=TRUE, ComponentLink1Description="Manufacturer URL", ComponentLink1URL=http://www.ti.com/, ComponentLink2Description=Datasheet, ComponentLink2URL=http://www.ti.com/general/docs/lit/getliterature.tsp?genericPartNumber=TPD4E001&fileType=pdf, ComponentLink3Description="URL Link1", ComponentLink3URL=SamplesURL:http://www.ti.com/product/tpd4e001#samples, DatasheetVersion=SLLS682G, Eco-Plan="Green (RoHS & no Sb/Br)", IEC 61000-4-2 Air-Gap(+/- kV)=15, IEC 61000-4-2 Contact(+/- kV)=8, IO Leakage Current(nA)=1.5, Mounting Technology="Surface Mount", PackageDescription="6-Pin Plastic Small-Outline Package, 2.9 x 1.6 mm Body, 0.95 mm Pitch, 2.8 mm Lead Span", PackageReference=DBV0006A, PackageVersion="revK, Mar-2006", PartNumber=TPD4E001DBVR, Serial ATA / eSATA=TRUE, SubFamily="ESD Solution", USB High Speed=TRUE
U2: library part CMP-0394-01056-2, "Single Output LDO, 200 mA, Fixed 3.3 V Output, 2 to 5.5 V Input, with Low IQ, 5-pin SOT (DDC), -40 to 125 degC, Green (RoHS & no Sb/Br)", Manufacturer="Texas Instruments", Accuracy(%)=2, Code_JEDEC=MO-193, ComponentLink1Description="Manufacturer URL", ComponentLink1URL=http://www.ti.com/, ComponentLink2Description=Datasheet, ComponentLink2URL=http://www.ti.com/general/docs/lit/getliterature.tsp?genericPartNumber=TLV70033&fileType=pdf, ComponentLink3Description="Package Specification", ComponentLink3URL=http://www.ti.com/litv/pdf/mpds123d, DatasheetVersion=SLVSA00D, Eco-Plan="Green (RoHS & no Sb/Br)", Fixed Output Options(V)=3.3, Iout(Max)(A)=0.2, Iq(Typ)(mA)=0.03, Mounting Technology="Surface Mount", PackageDescription="5-Pin Plastic Small Outline, Body 2.9 x 1.6 mm, 0.95 mm Pitch", PackageReference=DDC0005A, PackageVersion=4204403-2/E, PartNumber=TLV70033DDCR, SubFamily="Single Channel LDO", Vdo(Typ)(mV)=175, Vin(Max)(V)=5.5, Vin(Min)(V)=2, Vout Adj(Max)(V)=3.3, Vout Adj(Min)(V)=3.3
U3: library part CMP-0365-00412-2, "25 MHz Mixed Signal Microcontroller with 128 KB Flash, 8192 B SRAM and 63 GPIOs, -40 to 85 degC, 80-pin QFP (PN), Green (RoHS & no Sb/Br)", Frequency(MHz)=25, Manufacturer="Texas Instruments", Temp Sensor=Yes, ADC="12-bit SAR", ADC Channels=16, Brown Out Reset=Yes, Code_JEDEC=MS-018, Comparators=Yes, ComponentLink1Description="Manufacturer URL", ComponentLink1URL=http://www.ti.com/, ComponentLink2Description=Datasheet, ComponentLink2URL=http://www.ti.com/general/docs/lit/getliterature.tsp?genericPartNumber=MSP430F5529&fileType=pdf, ComponentLink3Description="Package Specification", ComponentLink3URL=http://www.ti.com/lit/ml/mtqf010a/mtqf010a.pdf, DatasheetVersion=SLAS590I, DMA=3, Eco-Plan="Green (RoHS & no Sb/Br)", Flash(KB)=128, GPIO=63, Mounting Technology="Surface Mount", Multiplier=32x32, PackageDescription="80-Pin Plastic Quad Flat Pack, Body 12 x 12 mm, Pitch 0.5 mm", PackageReference=PN0080A, PartNumber=MSP430F5529IPN, Real-Time Clock=Yes, SRAM(B)=8192, SubFamily="5 Series", SVS=Yes, Timers - 16-bit=4, USB=1, USCI_A (UART/LIN/IrDA/SPI)=2, USCI_B (I2C & SPI)=2, Watchdog=Yes
Y1: "No Description Available", Built_By=EMA_UL_Team, Copyright="Copyright (C) 2018 Accelerated Designs. All rights reserved", Manufacturer_Part_Number=CSTLS4M00G56-A0, RefDes=RefDes, Type=DEV, Vendor=Murata

## Via types
v1: diameter 24, hole 12, Top Layer to Bottom Layer, 27 vias
v2: diameter 30, hole 15, Top Layer to Bottom Layer, 11 vias
v3: diameter 23.62, hole 11.81, Top Layer to Bottom Layer, 6 vias
v4: diameter 40, hole 15, Top Layer to Bottom Layer, 5 vias
v5: diameter 50, hole 28, Top Layer to Bottom Layer, 2 vias
v6: diameter 50, hole 25, Top Layer to Bottom Layer, 1 vias

## Nets (pads, with @x,y where several pads share a name; then routed paths per layer and width w, separated by ;. In a path a pad name is that pad's centre, name@x,y a point inside that pad or via, vN(x,y) a via of type N, cw(c..) or ccw(c..) an arc to the next point about the centre after c; other vN are vias at no path point)
GND: C1.2 C2.2 C3.2 C4.2 C5.2 C6.2 C7.2 C8.2 C9.2 C10.2 C11.2 C12.2 C13.2 C14.2 C15.2 DS1.2 DS2.2 J1.5 J4.1 J5.2 R1.1 R4.1 R8.1 R10.1 U1.2 U2.2 U3.14 U3.19 U3.49 U3.61 U3.68 Y1.2 | length 1580.8
  Top Layer w8: J1.5 168.19,371.59 200.31,371.59 206.39,377.67 206.39,378.14 220,391.75 v1(220,395) ; U2.2 U2.2@340.3,222.3 ; v5@396.7,222.3 v5(397,222) ; v1(825,620) 829.33,620 835.12,614.21 U3.68 ; U3.49 1200.45,824.91 1200.45,759.55 1285,675 1285,350.28 1272.5,337.78 1251.09,337.78 1244.66,331.35 1244.66,329.47 1239.98,324.78 1239.82,324.78 1238.9,323.86 U3.14
  Top Layer w10: C2.2 605,959 648,916 R4.1 748,916 778.67,885.33 778.67,831.33 840.82,769.18 840.82,768.18 856.99,752.01 U3.61 ; v2(1200,230) 1238.9,268.9 U3.14 ; v2(1337.24,231.24) 1337.24,304.09 U3.19
  Top Layer w15: J5.2 114.88,1100 133.88,1081 194,1081 C12.2
  Top Layer w23: U2.2@340.3,222.3 v5@396.7,222.3
  other v1: 1610,81.1 1770,81.1 155,723.07
  other v2: 995,55 1100,55 1220,55 820,85 1427.24,111.24 940,1075 1060,1075 940,1355 1060,1355
  other v4: 190,55 270,55 590,65 538,427
  other v5: 785,825
NetC6_1: C6.1 U3.67 | length 133.7
  Top Layer w8: U3.67 1001.1,633.9 1018.53,616.47 1018.53,601.47 v1(1020,600)
NetC7_1: C7.1 U3.20 | length 117.2
  Top Layer w10: U3.20 1357.01,284.65 1391.65,250 1405,250 C7.1
NetC13_1: C13.1 R7.1 R8.2 U3.77 | length 1234.3
  Top Layer w8: v3(829.19,965) 830,965.81 830,1070.36 904,1144.36 904,1219 930,1245 R8.2 1070,1245 1096,1271 1096,1271.51 1120,1295.51 1120,1305 1170,1355 R7.1 ; v3(855,435) 856.13,436.13 908.25,436.13 U3.77
  Bottom Layer w8: v3(829.19,965) 830,965 855,940 873,922 873,783 855,765 v3(855,435)
NetC14_1: C14.1 R9.1 R10.2 U3.78 | length 1328.8
  Top Layer w8: U3.78 910.09,418.28 1183.28,418.28 1225,460 1225,635 1170,690 1035,690 969.07,755.93 969.07,939 943.07,965 R10.2 C14.1 1070,965 1144,1039 1144,1049 1170,1075 R9.1
NetC15_1: C15.1 U3.9 | length 204
  Top Layer w10: v1(1110,250) 1111.91,251.91 1115.29,251.91 1140.39,277.02 1140.39,304.09 U3.9
  Bottom Layer w10: C15.1 1025,160 1108.09,243.09 1108.09,248.09 v1(1110,250)
NetDS1_1: DS1.1 R11.2 | length 86.1
  Top Layer w8: DS1.1 R11.2
NetDS2_1: DS2.1 R12.2 | length 86.1
  Top Layer w8: DS2.1 R12.2
NetJ1_6: J1.6 J1.7 J1.8 J1.9 J1.10 J1.11 R1.2 U1.6 | length 857.5
  Top Layer w10: R1.2 110,65 95,80 87.62,80 59,108.62 J1.10 ; J1.11 98.37,194.49 91.4,187.52 91.4,181.61 64.91,155.12 J1.10 ; J1.6 151.52,440.55 114.12,477.95 v1(59,477.95) J1.8 J1.9 J1.10
  Bottom Layer w10: v1(59,477.95) 61.21,477.95 190.19,606.93 v1(192.4,606.93)
NetR5_2: R5.2 U3.63 | length 301.3
  Top Layer w10: R5.2 643,652 703.64,712.64 U3.63
NetR11_1: R11.1 U3.23 | length 180.2
  Top Layer w8: U3.23 1607.64,417.36 R11.1
NetR12_1: R12.1 U3.24 | length 398.5
  Top Layer w8: U3.24 1487.05,437.05 1530,480 1730,480 1760,450 1760,425 R12.1
NetU3_69: U3.69 Y1.1 | length 741.3
  Top Layer w8: v1(780,615) 780,613.65 799.13,594.53 U3.69
  Bottom Layer w8: Y1.1 736.85,658.15 v1(780,615)
NetU3_70: U3.70 Y1.3 | length 841.5
  Top Layer w8: v1(730,575) 753.89,575 754.04,574.84 U3.70
  Bottom Layer w8: Y1.3 640,665 v1(730,575)
SBW_RST: C12.1 J5.3 R6.1 U3.76 | length 1372.1
  Top Layer w8: J5.3 103.5,1196.5 143.5,1196.5 170,1170 215,1170 C12.1 R6.1 385,1165 402.56,1147.44 v1(402.56,788.94) ; 310,1195 355,1195 ; v1(738.06,456.94) 747.48,456.94 747.69,456.73 U3.76
  Bottom Layer w8: v1(402.56,788.94) 404.31,788.94 736.31,456.94 v1(738.06,456.94)
SBW_TEST: J5.4 U3.71 | length 1347
  Top Layer w8: J5.4 105,1295 325,1295 455,1165 v1(455,820) ; v1(710,540) 855,540 870.16,555.16 U3.71
  Bottom Layer w8: v1(455,820) 455,795 v1(710,540)
TARGET_RST: J4.4 U3.47 | length 584.3
  Top Layer w10: U3.47 1238.98,825.91 1238.98,852.98 1326,940 J4.4
TARGET_TEST: J4.3 U3.48 | length 593.7
  Top Layer w10: U3.48 1219.29,825.75 1219.29,798.67 1229.74,788.22 1708.22,788.22 J4.3
TARGET_UART_CTS: J4.7 U3.35 | length 750.7
  Top Layer w10: U3.35 1478.58,653.58 v1(1540,715)
  Bottom Layer w10: v1(1540,715) 1540,1020 J4.7
TARGET_UART_RTS: J4.8 U3.36 | length 818.9
  Top Layer w10: U3.36 1430.91,673.35 1457.98,673.35 1503.09,718.45 1503.09,723.09 v1(1505,725)
  Bottom Layer w10: v1(1505,725) 1505,1085 J4.8
TARGET_UART_RXD: J4.6 U3.40 | length 604.1
  Top Layer w10: U3.40 1559.3,752.01 1567.29,760 v1(1570,760)
  Bottom Layer w10: v1(1570,760) 1630,820 1630,1015 1755,1140 J4.6
TARGET_UART_TXD: J4.5 U3.41 | length 536.3
  Top Layer w10: U3.41 1357.01,877.01 1390,910 v1(1655,910)
  Bottom Layer w10: v1(1655,910) 1704.06,959.06 1704.06,984.06 J4.5
USB_D_N: C1.1 R2.2 U3.64 | length 511.5
  Top Layer w8: R2.2 577,637 587.5,626.5 587.5,625.58 596.58,616.5 700.14,616.5 775.78,692.14 U3.64@909.17,692.14
  Top Layer w15: C1.1 R2.2
USB_D_P: C2.1 R3.2 R4.2 R5.1 U3.62 | length 614.6
  Top Layer w8: R3.2 542.59,731.59 R5.1@630.41,731.59 ; R5.1@637.59,731.59 U3.62@909.17,731.59
  Top Layer w15: R3.2 538,837 C2.1 ; R5.1@630.41,731.59 630.41,808.41 635.5,813.5 635.5,823.5 648,836 R4.2
USB_RES_N: J1.2 R2.1 U1.4 | length 1244.3
  Top Layer w15: v1(118,605) 118,665.46 75,708.46 75,780 85,790 350,790 v1(390,750) ; J1.2 164.61,291.24 216.75,291.24 323.47,397.96 323.47,574.39 418.58,669.5 436.71,669.5 445.5,660.71 445.5,649.5 R2.1
  Bottom Layer w15: v1(390,750) 455,685 v1(455,635)
USB_RES_P: J1.3 R3.1 U1.1 | length 835.5
  Top Layer w15: J1.3 164.61,316.24 206.39,316.24 298.47,408.32 298.47,584.74 408.22,694.5 436.71,694.5 445.5,703.29 445.5,714.5 R3.1@454.07,723.07 ; U1.1 R3.1@454.07,723.07 ; R3.1 R3.1@454.07,723.07
VBUS: C3.1 J1.1 R7.2 U1.5 U2.1 U2.3 U3.65 | length 2319
  Top Layer w8: U1.5 155,570 170,555 250,555 265,540 v1(265,425) ; v6(260,245) 304.19,289.19 499.19,289.19 639.21,429.21 639.21,531.08 773.13,665 v1(805,665) 844.73,665 853,673.27 U3.65 ; U2.3 331.2,193.99 311.01,193.99 300,205 300,245 306.2,251.2 331.2,251.2 U2.1 ; v1(850,875) 850,1071.97 928.03,1150 1110,1150 1170,1210 1170,1235 R7.2
  Bottom Layer w8: v6(260,245) 262.7,247.7 262.7,422.7 v1(265,425) ; v1(805,665) 830,690 830,780 850,800 v1(850,875)
VCC: C4.1 C8.1 C9.1 C10.1 C11.1 J4.2 J5.1 R6.2 R9.2 U2.5 U3.11 U3.18 U3.50 | length 4519.1
  Top Layer w8: U3.11@1179.76,304.09 U3.11 1179.84,323.86 1180.76,324.78 1180.92,324.78 1185.61,329.47 1185.61,331.35 1192.03,337.78 1213.45,337.78 1260,384.33 1260,681.62 1179.84,761.77 1179.84,964.84 R9.2
  Top Layer w10: v3(330,825) v1(330,1055) ; v3(355,570) 455,470 v3(455,310) ; C4.1@600,180 C10.1@1082.74,180 ; U3.11@1179.76,304.09 1179.76,277.02 C10.1@1082.74,180 ; U3.18 1317.56,304.09 1317.56,277.02 1220.54,180 C10.1@1082.74,180
  Top Layer w15: J5.1 290,1000 301.59,1011.59 301.59,1032.5 324.09,1055 v1(330,1055)
  Bottom Layer w10: v3(330,825) 330,595 v3(355,570) ; v3(453.64,260) 454.32,260.68 454.32,309.32 v3(455,310)
  Bottom Layer w20: v4(590,250) 645,305 670,305 1800,305 1840,345 1840,660 J4.2
VUSB: C5.1 U3.66 | length 253
  Top Layer w8: U3.66 1086.42,653.58 v1(1140,600)
pads on no net: J1.4 U1.3 U2.4 U3.1 U3.2 U3.3 U3.4 U3.5 U3.6 U3.7 U3.8 U3.10 U3.12 U3.13 U3.15 U3.16 U3.17 U3.21 U3.22 U3.25 U3.26 U3.27 U3.28 U3.29 U3.30 U3.31 U3.32 U3.33 U3.34 U3.37 U3.38 U3.39 U3.42 U3.43 U3.44 U3.45 U3.46 U3.51 U3.52 U3.53 U3.54 U3.55 U3.56 U3.57 U3.58 U3.59 U3.60 U3.72 U3.73 U3.74 U3.75 U3.79 U3.80

## Polygon pours and split planes (outlines as drawn)
VCC on Top Layer "VCC_L01_P002" (solid, pour order 2): 430,280 630,280 630,160 550,160 550,230 430,230
VBUS on Top Layer "VBUS_L01_P004" (solid, pour order 4): 135,275 370,275 370,150 135,150
GND on Bottom Layer "GND_L02_P003" (solid, pour order 3): 20,1480 1840,1480 1840,20 20,20

## Silkscreen, mask and mechanical layers (free items; w line width, h text height)
Top Overlay:
  text "URC eZ-FETT Lite (V1.0)" at 280,1415 h60
  text "RTS" at 1577.63,1316 h40
  text "Debug" at 219.67,1232 h40 r90
  text "CTS" at 1577.63,1211 h40
  text "RXD" at 1577.63,1116 h40
  text "TXD" at 1577.63,1021 h40
  text "Target" at 1525.01,1000 h60 r90
  text "RST" at 1577.63,916 h40
  text "TST" at 1577.63,821 h40
  text "VCC" at 1577.63,716 h40
  text "GND" at 1577.63,611 h40
Bottom Overlay:
  text "JLCJLCJLCJLC" at 740,50 h60
Mechanical 1:
  the board outline again, w10

## Text inside footprints (layer, text, board x,y; h text height)
J1: Mechanical 1 "Board edge" at 6.66,96.54 h7.87 r270